# Altium PCB M-Test-Board.PcbDoc (part 1 of 2)
Units mm, origin at the board's own origin, x right, y up, seen from the top; angles counter-clockwise.
Board outline 140.08 x 105.54 mm, 2 copper layers (Top Layer, Bottom Layer); 209 components, 139 nets, 677 pads, 0 vias.
Unrouted connection lines stored in the file: 434.
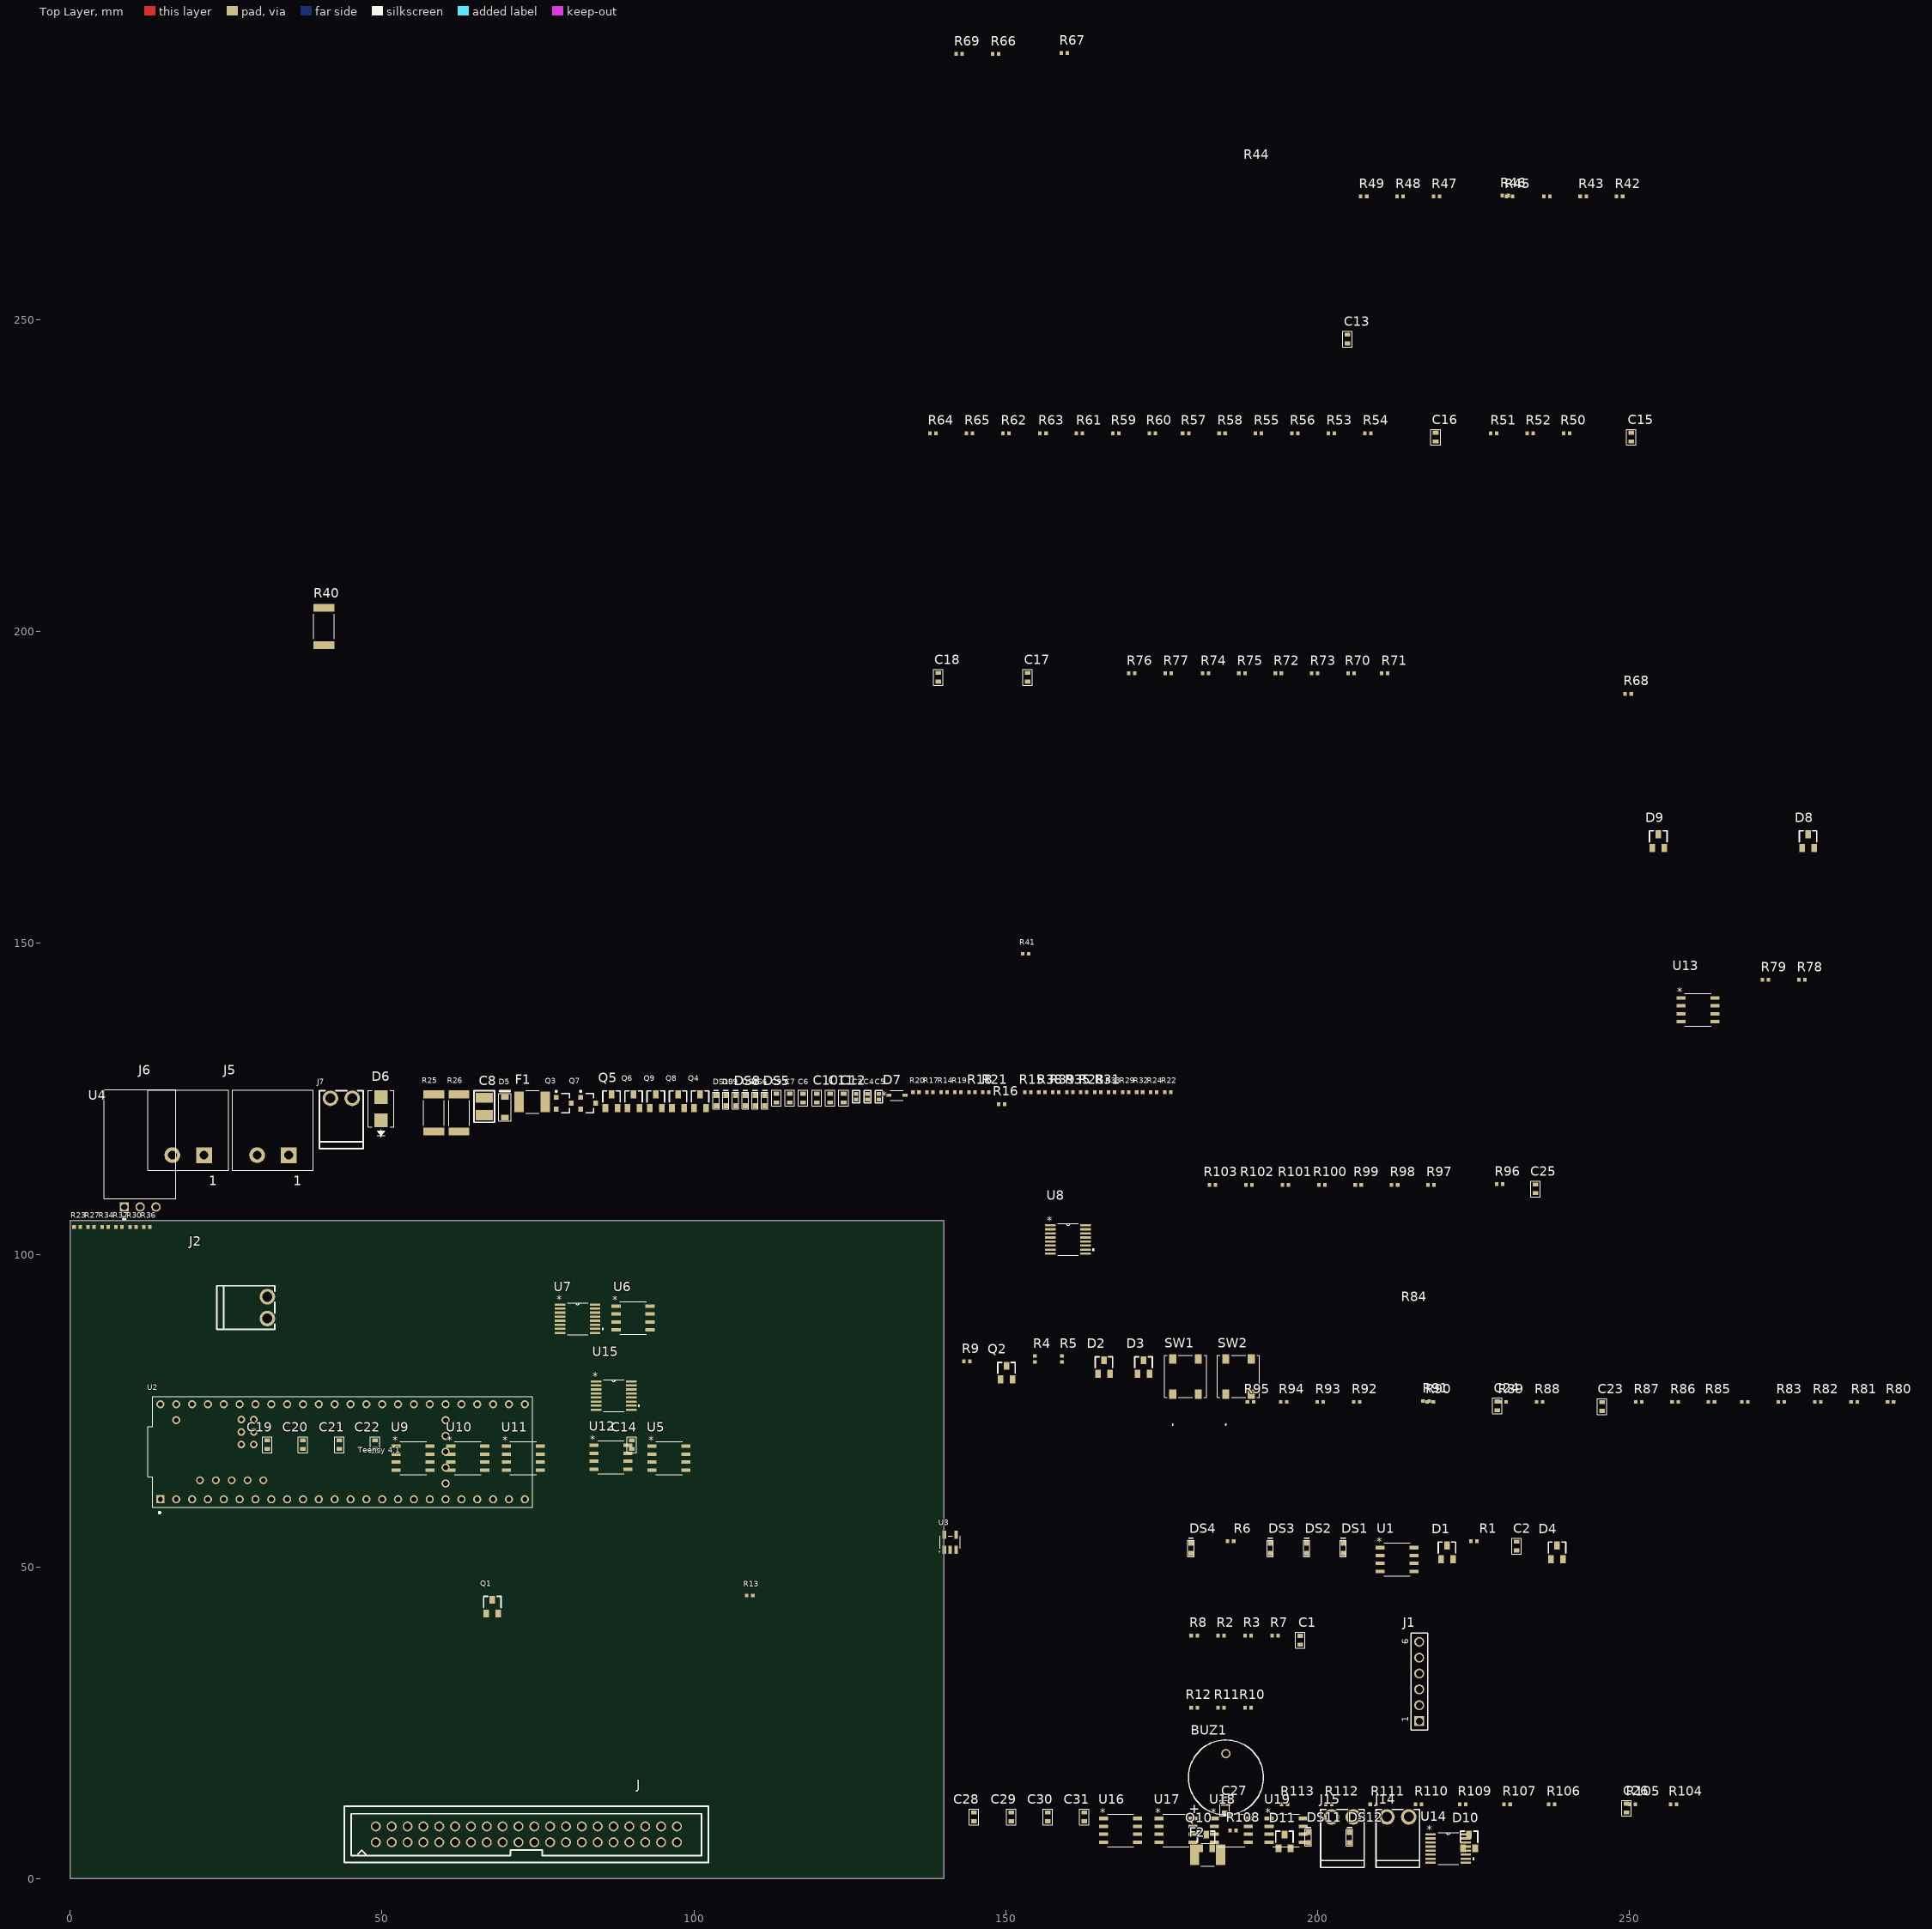
[diagram p0: Top Layer view]
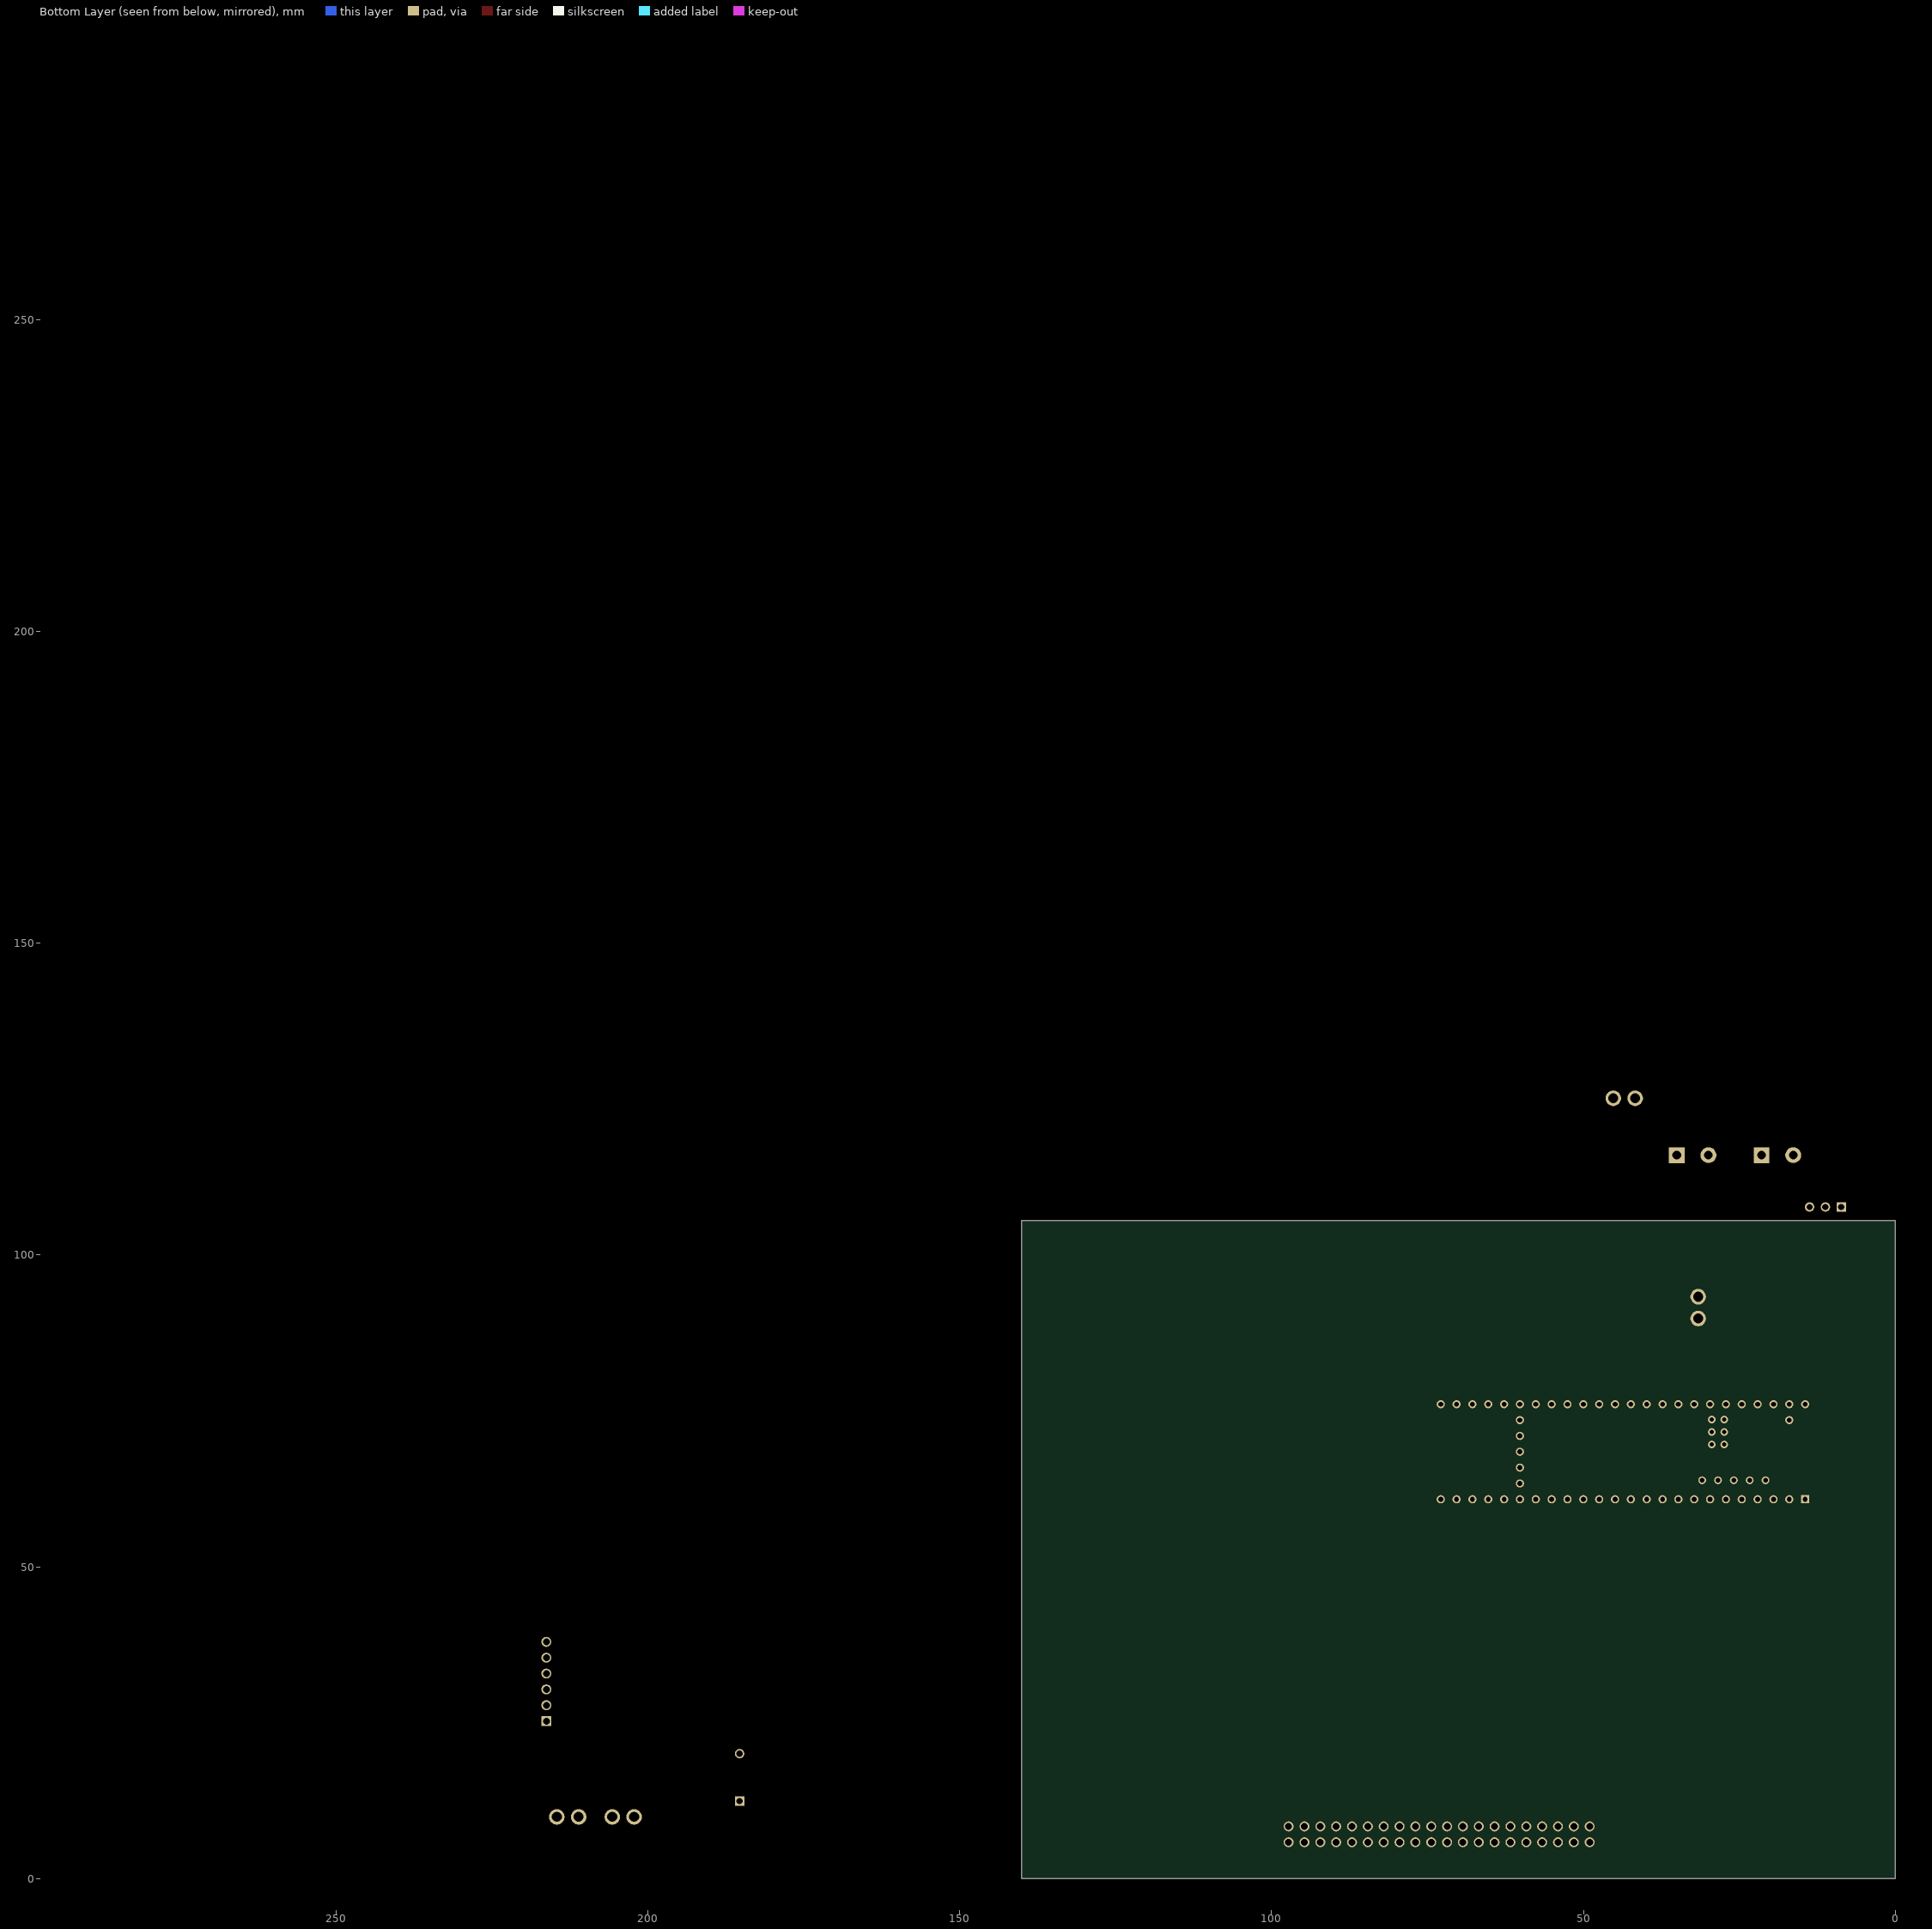
[diagram p1: Bottom Layer view, seen from below]

## Layer stack, top to bottom
Top Solder: solder mask 0.0102, Solder Resist, Dk 3.5
Top Layer: signal copper 0.0356
Dielectric 1: dielectric 0.32, FR-4, Dk 4.8
Bottom Layer: signal copper 0.0356
Bottom Solder: solder mask 0.0102, Solder Resist, Dk 3.5

## Board outline
0,0 140.081,0 140.081,105.537 0,105.537

## Design rules (kind name [scope] priority, off if disabled: settings)
Clearance [All] p1: gap=0.254 ignorepadtopadclearanceinfootprint=FALSE except(0: Arc-Hole Track-Hole SMDPad-Hole THPad-Hole Via-Hole Fill-Hole Poly-Hole Region-Hole Text-Hole)
PolygonConnect [All] p1: connectstyle=Relief reliefconductorwidth=0.254 reliefentries=4 polygonreliefangle="90 Angle" airgapwidth=0.254
RoomDefinition InputOutput [InComponentClass('InputOutput')] p1: confinementstyle=ConfineIn formatcopy=TRUE lockcomponents=FALSE outline 178.943,1.524 435.737,1.524 435.737,15.24 178.943,15.24
RoomDefinition Teensy [InComponentClass('Teensy')] p2: confinementstyle=ConfineIn formatcopy=TRUE lockcomponents=FALSE outline 178.943,24.257 194.818,24.257 194.818,30.734 178.943,30.734
RoomDefinition RibbonCable [InComponentClass('RibbonCable')] p3: confinementstyle=ConfineIn formatcopy=TRUE lockcomponents=FALSE outline 147.147,148.971 263.987,148.971 263.987,196.723 147.147,196.723
RoomDefinition Power [InComponentClass('Power')] p4: confinementstyle=ConfineIn formatcopy=TRUE lockcomponents=FALSE outline 0,0 139.7,0 139.7,105.029 0,105.029
RoutingVias [All] p1: holewidth=0.711 width=1.27 viastyle="Through Hole" minholewidth=0.711 minwidth=1.27 maxholewidth=0.711 maxwidth=1.27
SolderMaskExpansion [All] p1: expansion=0.102 istentingtop=FALSE
Width [All] p1: maxlimit=0.254 minlimit=0.254 preferedwidth=0.254
30 further rules are at their usual default settings.

## Classes and differential pairs
component class InputOutput: C24 C25 C26 C27 C28 C29 C30 C31 D10 D11 DS11 DS12 J10 J11 J12 J13 J14 J15 J16 Q10 R91 R96 R97 R100 R104 R106 R107 R112 R113 U13 U14 U15 U16 U17 U18 U19
component class RibbonCable: C13 C15 C16 C17 C18 C24 C25 C26 C27 D8 D9 R46 R67 R68 R91 R96 U4 U6 U7 U8 U12 U13 U14 U15
component class Power: C4 C6 C8 C9 C11 D5 D6 D7 DS5 DS6 DS7 DS8 DS9 DS10 F1 F2 J5 J7 Q3 Q4 Q5 Q6 Q7 Q8 Q9 R16 R21 R24 R27 R32 R33 R40 R67 U4
component class Teensy: BUZ1 C2 D4 D5 D6 DS1 DS2 DS3 DS4 J J1 J2 Q1 Q2 R2 R3 R6 R8 R10 R16 R21 SW1 SW2

## Components (designator, comment, footprint, x,y, rotation, side; value= is the part's Value field where it differs from the comment)
BUZ1 "CEM-1205-IC" BUZZ-MB5120C 185.293,12.446 r0 top
C1 "100nF" C0603 197.231,38.227 r0 top
C2 "4.7uF" C0603 231.902,53.34 r0 top
C3 "1uF" C0402 126.004,125.374 r90 top
C4 "1uF" C0402 127.833,125.374 r90 top
C5 "1uF" C0402 129.662,125.374 r90 top
C6 "4.7uF" C0603 117.533,125.158 r0 top
C7 "100nF" C0603 115.374,125.158 r0 top
C8 "47uF" C1210 66.398,123.825 r0 top
C9 "100nF" C0603 113.215,125.158 r0 top
C10 "100nF" C0603 119.692,125.158 r0 top
C11 "4.7uF" C0603 121.851,125.158 r0 top
C12 "100nF" C0603 124.01,125.158 r0 top
C13 "100nF" C0603 204.805,246.888 r0 top
C14 "100nF" C0603 90.043,69.596 r0 top
C15 "4.7uF" C0603 250.294,231.14 r0 top
C16 "100nF" C0603 218.925,231.14 r0 top
C17 "4.7uF" C0603 153.52,192.659 r0 top
C18 "100nF" C0603 139.169,192.659 r0 top
C19 "100nF" C0603 31.623,69.596 r0 top
C20 "100nF" C0603 37.338,69.596 r0 top
C21 "100nF" C0603 43.18,69.596 r0 top
C22 "100nF" C0603 48.895,69.596 r0 top
C23 "100nF" C0603 245.618,75.692 r0 top
C24 "4.7uF" C0603 228.808,75.819 r0 top
C25 "100nF" C0603 234.904,110.617 r0 top
C26 "4.7uF" C0603 249.509,11.303 r0 top
C27 "100nF" C0603 185.12,11.303 r0 top
C28 "100nF" C0603 144.907,9.906 r0 top
C29 "100nF" C0603 150.876,9.906 r0 top
C30 "100nF" C0603 156.718,9.906 r0 top
C31 "100nF" C0603 162.56,9.906 r0 top
D1 "BAT54S" sot23-3 220.726,52.324 r0 top
D2 "BAT54S" sot23-3 165.735,82.042 r0 top
D3 "BAT54S" sot23-3 172.085,82.042 r0 top
D4 "BAT54S" sot23-3 238.379,52.324 r0 top
D5 "B5819WS-TP" MCC-SOD123_V 69.709,123.701 r90 top
D6 "B240Q-13-F" DIODE_DO214AA 49.847,123.444 r90 top
D7 "3.9V" SOD-323_1P8X1P35_ONS 132.532,125.616 r0 top
D8 "BAT54S" sot23-3 278.615,166.37 r0 top
D9 "BAT54S" sot23-3 254.612,166.37 r0 top
D10 "BAT54S" sot23-3 224.282,5.969 r0 top
D11 "BAT54S" sot23-3 194.691,5.969 r0 top
DS1 "LTST-C193KFKT-5A" LED-ORANGE_0603 204.089,52.959 r90 top
DS2 "LTST-C193KSKT-5A" LED-YELLOW_0603 198.247,52.959 r90 top
DS3 "LTST-C193TGKT-5A" LED-GREEN_0603 192.405,52.959 r90 top
DS4 "LTST-C193KRKT-5A" LED-RED_0603 179.705,52.959 r90 top
DS5 "LTST-C193TGKT-5A" LED-GREEN_0603 111.365,124.767 r90 top
DS6 "LTST-C193KSKT-5A" LED-YELLOW_0603 109.807,124.767 r90 top
DS7 "LTST-C193KFKT-5A" LED-ORANGE_0603 108.249,124.767 r90 top
DS8 "LTST-C193KFKT-5A" LED-ORANGE_0603 106.691,124.767 r90 top
DS9 "LTST-C193TGKT-5A" LED-GREEN_0603 105.133,124.767 r90 top
DS10 "LTST-C193KRKT-5A" LED-RED_0603 103.575,124.767 r90 top
DS11 "LTST-C193KFKT-5A" LED-ORANGE_0603 198.501,6.604 r90 top
DS12 "LTST-C193TGKT-5A" LED-GREEN_0603 205.105,6.604 r90 top
F1 "MF-MSMF050-2" FUSE_F050-2 74.087,124.587 r0 top
F2 "MF-MSMF050-2" FUSE_F050-2 182.372,3.81 r0 top
J "61204021621" IDC-TH_Z-231011040106 73.152,7.112 r0 top
J1 "" 61300611121 216.281,31.623 r90 top
J2 "EBSA-02-A" CONN-TH_2P-P3.50_JL15EDGRC-35002G01 31.623,91.567 r270 top
J5 "Green 5.08mm" Conn_5433668 35.059,116.014 r0 top
J6 "Gray 5.08mm" Conn_5442002 21.47,116.014 r0 top
J7 "EBSA-02-A" CONN-TH_2P-P3.50_JL15EDGRC-35002G01 43.484,125.14 r0 top
J14 "EBSA-02-A" CONN-TH_2P-P3.50_JL15EDGRC-35002G01 212.852,9.906 r0 top
J15 "EBSA-02-A" CONN-TH_2P-P3.50_JL15EDGRC-35002G01 203.962,9.906 r0 top
Q1 "MMBT3904" SOT23-3 67.691,43.626 r0 top
Q2 "MMBT3904" SOT23-3 150.114,81.153 r0 top
Q3 "AO3401A" AO-SOT-23-3L_V 79.141,124.342 r0 top
Q4 "MMBT3904" SOT23-3 101.01,124.663 r0 top
Q5 "MMBT3906" sot23-3 86.786,124.663 r0 top
Q6 "MMBT3904" SOT23-3 90.342,124.663 r0 top
Q7 "AO3401A" AO-SOT-23-3L_V 83.052,124.342 r0 top
Q8 "MMBT3904" SOT23-3 97.454,124.663 r0 top
Q9 "MMBT3904" SOT23-3 93.898,124.663 r0 top
Q10 "MMBT3904" sot23-3 182.118,5.969 r0 top
R1 "5.1K 1%" R0402 225.044,54.102 r0 top
R2 "330R 1%" R0402 184.531,38.989 r0 top
R3 "330R 1%" R0402 188.849,38.989 r0 top
R4 "1K 1%" R0402 154.686,83.312 r90 top
R5 "1K 1%" R0402 159.004,83.312 r90 top
R6 "120R" R0402 186.055,54.102 r0 top
R7 "10K 1%" R0402 193.167,38.989 r0 top
R8 "100K 1%" R0402 180.213,38.989 r0 top
R9 "1K 1%" r0402 143.764,82.931 r0 top
R10 "330R 1%" R0402 188.849,27.432 r0 top
R11 "330R 1%" R0402 184.531,27.432 r0 top
R12 "330R 1%" R0402 180.213,27.432 r0 top
R13 "330R 1%" R0402 108.966,45.404 r0 top
R14 "330R 1%" R0402 140.091,126.09 r0 top
R15 "10K 1%" R0402 153.538,126.09 r0 top
R16 "10K 1%" R0402 149.352,124.206 r0 top
R17 "5.1K 1%" R0402 137.85,126.09 r0 top
R18 "10K 1%" R0402 144.573,126.09 r0 top
R19 "10K 1%" R0402 142.332,126.09 r0 top
R20 "100K 1%" R0402 135.609,126.09 r0 top
R21 "2.8K 1%" R0402 146.815,126.09 r0 top
R22 "10K 1%" R0402 175.95,126.09 r0 top
R23 "10K 1%" R0402 1.121,104.499 r0 top
R24 "100K 1%" R0402 173.709,126.09 r0 top
R25 "220R 5%" RESC6331X75N 58.319,122.785 r90 top
R26 "220R 5%" RESC6331X75N 62.35,122.785 r90 top
R27 "10K 1%" R0402 3.362,104.499 r0 top
R28 "10K 1%" R0402 162.503,126.09 r0 top
R29 "5.1K 1%" R0402 169.227,126.09 r0 top
R30 "10K 1%" R0402 10.085,104.499 r0 top
R31 "10K 1%" R0402 164.744,126.09 r0 top
R32 "100K 1%" R0402 171.468,126.09 r0 top
R33 "100K 1%" R0402 166.985,126.09 r0 top
R34 "2.8K 1%" R0402 5.603,104.499 r0 top
R35 "2.8K 1%" R0402 160.262,126.09 r0 top
R36 "10K 1%" R0402 12.327,104.499 r0 top
R37 "100K 1%" R0402 7.844,104.499 r0 top
R38 "680R 1%" R0402 155.779,126.09 r0 top
R39 "330R 1%" R0402 158.021,126.09 r0 top
R40 "220R 5%" RESC6331X75N 40.699,200.787 r90 top
R41 "5.1K 1%" R0402 153.202,148.315 r0 top
R42 "51K 1%" R0402 248.412,269.748 r0 top
R43 "51K 1%" R0402 242.57,269.748 r0 top
R44 "51K 1%" R0402 236.728,269.748 r0 top
R45 "2.8K 1%" R0402 230.759,269.748 r0 top
R46 "8.2K 1%" R0402 230.078,269.875 r0 top
R47 "8.2K 1%" R0402 219.075,269.748 r0 top
R48 "8.2K 1%" R0402 213.233,269.748 r0 top
R49 "2.8K 1%" R0402 207.391,269.748 r0 top
R50 "10K 1%" R0402 239.926,231.775 r0 top
R51 "10K 1%" R0402 228.242,231.775 r0 top
R52 "10K 1%" R0402 234.084,231.775 r0 top
R53 "10K 1%" R0402 202.207,231.775 r0 top
R54 "10K 1%" R0402 208.049,231.775 r0 top
R55 "10K 1%" R0402 190.523,231.775 r0 top
R56 "10K 1%" R0402 196.365,231.775 r0 top
R57 "10K 1%" R0402 178.839,231.775 r0 top
R58 "10K 1%" R0402 184.681,231.775 r0 top
R59 "10K 1%" R0402 167.663,231.775 r0 top
R60 "10K 1%" R0402 173.505,231.775 r0 top
R61 "10K 1%" R0402 161.821,231.775 r0 top
R62 "10K 1%" R0402 150.01,231.775 r0 top
R63 "10K 1%" R0402 155.979,231.775 r0 top
R64 "10K 1%" R0402 138.326,231.775 r0 top
R65 "10K 1%" R0402 144.168,231.775 r0 top
R66 "10K 1%" R0402 148.359,292.608 r0 top
R67 "10K 1%" R0402 159.362,292.735 r0 top
R68 "10K 1%" R0402 249.786,189.992 r0 top
R69 "10K 1%" R0402 142.517,292.608 r0 top
R70 "10K 1%" R0402 205.382,193.294 r0 top
R71 "10K 1%" R0402 210.716,193.294 r0 top
R72 "10K 1%" R0402 193.698,193.294 r0 top
R73 "10K 1%" R0402 199.54,193.294 r0 top
R74 "10K 1%" R0402 182.014,193.294 r0 top
R75 "10K 1%" R0402 187.856,193.294 r0 top
R76 "10K 1%" R0402 170.203,193.294 r0 top
R77 "10K 1%" R0402 176.045,193.294 r0 top
R78 "51K 1%" R0402 277.645,144.145 r0 top
R79 "51K 1%" R0402 271.803,144.145 r0 top
R80 "51K 1%" R0402 291.846,76.454 r0 top
R81 "51K 1%" R0402 286.004,76.454 r0 top
R82 "51K 1%" R0402 280.162,76.454 r0 top
R83 "51K 1%" R0402 274.32,76.454 r0 top
R84 "51K 1%" R0402 268.478,76.454 r0 top
R85 "51K 1%" R0402 263.144,76.454 r0 top
R86 "2.8K 1%" R0402 257.302,76.454 r0 top
R87 "2.8K 1%" R0402 251.46,76.454 r0 top
R88 "10K 1%" R0402 235.585,76.454 r0 top
R89 "10K 1%" R0402 229.743,76.454 r0 top
R90 "10K 1%" R0402 218.059,76.454 r0 top
R91 "10K 1%" R0402 217.378,76.581 r0 top
R92 "10K 1%" R0402 206.248,76.454 r0 top
R93 "10K 1%" R0402 200.406,76.454 r0 top
R94 "10K 1%" R0402 194.564,76.454 r0 top
R95 "10K 1%" R0402 189.23,76.454 r0 top
R96 "51K 1%" R0402 229.189,111.379 r0 top
R97 "51K 1%" R0402 218.186,111.252 r0 top
R98 "51K 1%" R0402 212.344,111.252 r0 top
R99 "51K 1%" R0402 206.502,111.252 r0 top
R100 "10K 1%" R0402 200.66,111.252 r0 top
R101 "10K 1%" R0402 194.818,111.252 r0 top
R102 "10K 1%" R0402 188.976,111.252 r0 top
R103 "2.8K 1%" R0402 183.134,111.252 r0 top
R104 "10K 1%" R0402 257.048,11.938 r0 top
R105 "10K 1%" R0402 250.444,11.938 r0 top
R106 "10K 1%" R0402 237.49,11.938 r0 top
R107 "10K 1%" R0402 230.378,11.938 r0 top
R108 "330R 1%" R0402 186.436,7.747 r0 top
R109 "10K 1%" R0402 223.266,11.938 r0 top
R110 "10K 1%" R0402 216.154,11.938 r0 top
R111 "10K 1%" R0402 208.915,11.938 r0 top
R112 "10K 1%" R0402 201.803,11.938 r0 top
R113 "10K 1%" R0402 194.691,11.938 r0 top
SW1 "KSC741J LFS-Blue" SON4_KSC741JLFS_CNK 178.816,80.518 r90 top
SW2 "KSC441J70SHLFS-Yellow" SON4_KSC741JLFS_CNK 187.325,80.518 r90 top
U1 "SP485EEN-L/TR-ND" NSOIC-8 212.725,51.181 r0 top
U2 "Teensy 4.1" MODULE_DEV-16771 43.688,68.453 r0 top
U3 "LK112M33TR" SOT23-5L_STM 141.097,53.956 r90 top
U4 "V7805-2000R" CONV_V7805-2000R 11.229,117.805 r90 top
U5 "TPD4E001DRLR" NSOIC-8 96.012,67.437 r0 top
U6 "LPV358M/NOPB" M08A_TEX 90.251,89.916 r0 top
U7 "CD74HC4051PWR" 16-TSSOP-4.4mm 81.361,89.789 r0 top
U8 "CD74HC4051PWR" 16-TSSOP-4.4mm 159.974,102.489 r0 top
U9 "TPD4E001DRLR" NSOIC-8 54.991,67.437 r0 top
U10 "TPD4E001DRLR" NSOIC-8 63.754,67.437 r0 top
U11 "TPD4E001DRLR" NSOIC-8 72.644,67.437 r0 top
U12 "TPD4E001DRLR" NSOIC-8 86.695,67.564 r0 top
U13 "LPV358M/NOPB" M08A_TEX 260.962,139.319 r0 top
U14 "CD74HC4051PWR" 16-TSSOP-4.4mm 220.934,4.826 r0 top
U15 "CD74HC4051PWR" 16-TSSOP-4.4mm 87.145,77.47 r0 top
U16 "TPD4E001DRLR" NSOIC-8 168.402,7.747 r0 top
U17 "TPD4E001DRLR" NSOIC-8 177.292,7.747 r0 top
U18 "TPD4E001DRLR" NSOIC-8 186.182,7.747 r0 top
U19 "TPD4E001DRLR" NSOIC-8 194.945,7.747 r0 top

## Footprints (in the part's own frame and the unit in brackets; to place one, negate y for a bottom-side part, rotate by r counter-clockwise, add the part's x,y. Pads: shape width x height; smd on the part's side, far side on the other; paste and mask are expansions set on the pad)
16-TSSOP-4.4mm [mil]
  rect 66x14 smd: 1(-111,89.57) 2(-111,63.98) 3(-111,38.39) 4(-111,12.8) 5(-111,-12.8) 6(-111,-38.39) 7(-111,-63.98) 8(-111,-89.57) 9(111,-89.57) 10(111,-63.98) 11(111,-38.39) 12(111,-12.8) 13(111,12.8) 14(111,38.39) 15(111,63.98) 16(111,89.57)
  silkscreen extent -66,-100 164,100, body extent -130,-101 130,101, height 47
61300611121 [mm] "Pin Header, pitch 2.54 mm, THT, Vertical, single row, 6p"
  rect 1.6x1.6 hole 1.1: 1(-6.35,0)
  round 1.6 hole 1.1: 2(-3.81,0) 3(-1.27,0) 4(1.27,0) 5(3.81,0) 6(6.35,0)
  silkscreen extent -7.77,-1.35 7.77,1.35, body extent -7.62,-1.27 7.62,1.27, height 8.57
AO-SOT-23-3L_V [mm] "SOT23, 3-Leads, Body 3.1x1.8mm, Pitch 0.95mm"
  rect 0.8x0.8 smd: 1(-1.2,0.95) 2(-1.2,-0.95) 3(1.2,0)
  silkscreen extent -1.32,-1.55 0.9,2.02, body extent -1.5,-1.58 1.5,1.52, height 1.25
BUZZ-MB5120C [mil]
  rect 60x60 / inner round 60 / far side rect 60x60 hole 40: 1(0,0)
  round 60 hole 40: 2(0,299.21)
  silkscreen extent -236,-87 236,385, body extent -234,-86 238,386, height 355
C0402 [mil]
  rect 24x28 smd: 1(-17.7,0) 2(17.7,0)
  silkscreen extent -40,-22 40,22, body extent -21,-11 21,11, height 22
C0603 [mm]
  rect 0.9x0.65 smd: 1(0,0.71) 2(0,-0.7)
  silkscreen extent -0.76,-1.27 0.76,1.27, body extent -0.48,-0.87 0.48,0.87, height 0.87
C1210 [mm]
  rect 2.7x1.6 smd: 1(0,1.397) 2(0,-1.397)
  silkscreen extent -1.65,-2.54 1.65,2.54, body extent -0.9,-1.7 0.9,1.7, height 0.94
CONN-TH_2P-P3.50_JL15EDGRC-35002G01 [mm]
  round 2.5 hole 1.6: 1(-1.75,0) 2(1.75,0)
  silkscreen extent -3.5,-8.1 3.5,1.2, body extent -3.92,-8.03 3.68,1.17, height 6.91
Conn_5433668 [mil]
  rect 100x100 hole 55 mask+3: 1(0,0)
  round 100 hole 55 mask+3: 2(-200,0)
  silkscreen extent -355,-95 155,410, body extent -339,-79 139,394, height 339
Conn_5442002 [mil]
  rect 100x100 hole 55 mask+3: 1(0,0)
  round 100 hole 55 mask+3: 2(-200,0)
  silkscreen extent -355,-95 155,410, body extent -339,-79 139,394, height 339
CONV_V7805-2000R [mm]
  rect 1.508x1.508 hole 1: 1(-10.1,2.54)
  round 1.508 hole 1: 2(-10.1,0) 3(-10.1,-2.54)
  silkscreen extent -12.07,-5.75 8.75,5.75, body extent -10.26,-5.78 8.74,5.72, height 9.01
DIODE_DO214AA [mil]
  rect 86x86 smd: 1(-73,0) 2(73,0)
  silkscreen extent -180,-82 115,82, body extent -110,-77 110,77, height 98
FUSE_F050-2 [mil]
  rect 59x130 smd paste+0 mask+0: 1(-82.5,0) 2(82.5,0)
  silkscreen extent -42,-72 42,72, body extent -93,-67 93,67, height 33
IDC-TH_Z-231011040106 [mm]
  round 1.6 hole 1.1: 1(-24.13,-1.27) 2(-24.13,1.27) 3(-21.59,-1.27) 4(-21.59,1.27) 5(-19.05,-1.27) 6(-19.05,1.27) 7(-16.51,-1.27) 8(-16.51,1.27) 9(-13.97,-1.27) 10(-13.97,1.27) 11(-11.43,-1.27) 12(-11.43,1.27) 13(-8.89,-1.27) 14(-8.89,1.27) 15(-6.35,-1.27) 16(-6.35,1.27) 17(-3.81,-1.27) 18(-3.81,1.27) 19(-1.27,-1.27) 20(-1.27,1.27) 21(1.27,-1.27) 22(1.27,1.27) 23(3.81,-1.27) 24(3.81,1.27) 25(6.35,-1.27) 26(6.35,1.27) 27(8.89,-1.27) 28(8.89,1.27) 29(11.43,-1.27) 30(11.43,1.27) 31(13.97,-1.27) 32(13.97,1.27) 33(16.51,-1.27) 34(16.51,1.27) 35(19.05,-1.27) 36(19.05,1.27) 37(21.59,-1.27) 38(21.59,1.27) 39(24.13,-1.27) 40(24.13,1.27)
  silkscreen extent -29.2,-4.5 29.2,4.52, body extent -29.26,-4.35 29.2,4.83, height 4.43
LED-GREEN_0603 [mm] "SMD, 2-Leads, Body 1.6x0.8mm"
  rect 0.8x0.8 smd: 1(-0.825,0) 2(0.825,0)
  silkscreen extent -1.33,-0.49 1.62,0.51, body extent -0.8,-0.4 0.8,0.4, height 0.4
LED-ORANGE_0603 [mm] "SMD, 2-Leads, Body 1.6x0.8mm"
  rect 0.8x0.8 smd: 1(-0.825,0) 2(0.825,0)
  silkscreen extent -1.33,-0.49 1.62,0.51, body extent -0.8,-0.4 0.8,0.4, height 0.4
LED-RED_0603 [mm] "SMD, 2-Leads, Body 1.6x0.8mm"
  rect 0.8x0.8 smd: 1(-0.825,0) 2(0.825,0)
  silkscreen extent -1.33,-0.49 1.62,0.51, body extent -0.8,-0.4 0.8,0.4, height 0.4
LED-YELLOW_0603 [mm] "SMD, 2-Leads, Body 1.6x0.8mm"
  rect 0.8x0.8 smd: 1(-0.825,0) 2(0.825,0)
  silkscreen extent -1.33,-0.49 1.62,0.51, body extent -0.8,-0.4 0.8,0.4, height 0.4
M08A_TEX [mil]
  rect 57.5x22 smd paste+0 mask+0: 1(-107.25,75) 2(-107.25,25) 3(-107.25,-25) 4(-107.25,-75) 5(107.25,-75) 6(107.25,-25) 7(107.25,25) 8(107.25,75)
  silkscreen extent -84,-104 84,104, body extent -122,-99 122,99, height 69
MCC-SOD123_V [mil] "SOD123, 2-Leads, Body 2.7x1.6mm, Height 1.35mm"
  rect 35.98x47.99 smd: 1(-64.5,0) 2(64.5,0)
  silkscreen extent -86,-39 102,39, body extent -53,-30 53,32, height 53
MODULE_DEV-16771 [mm]
  round 1.308 hole 0.8: 0(-26.67,-7.62) 1(-24.13,-7.62) 2(-21.59,-7.62) 3(-19.05,-7.62) 3.3V_1(6.35,-7.62) 3.3V_2(-24.13,7.62) 3.3V_3(16.51,-2.54) 4(-16.51,-7.62) 5(-13.97,-7.62) 6(-11.43,-7.62) 7(-8.89,-7.62) 8(-6.35,-7.62) 9(-3.81,-7.62) 10(-1.27,-7.62) 11(1.27,-7.62) 12(3.81,-7.62) 13(3.81,7.62) 14(1.27,7.62) 15(-1.27,7.62) 16(-3.81,7.62) 17(-6.35,7.62) 18(-8.89,7.62) 19(-11.43,7.62) 20(-13.97,7.62) 21(-16.51,7.62) 22(-19.05,7.62) 23(-21.59,7.62) 24(8.89,-7.62) 25(11.43,-7.62) 26(13.97,-7.62) 27(16.51,-7.62) 28(19.05,-7.62) 29(21.59,-7.62) 30(24.13,-7.62) 31(26.67,-7.62) 32(29.21,-7.62) 33(29.21,7.62) 34(26.67,7.62) 35(24.13,7.62) 36(21.59,7.62) 37(19.05,7.62) 38(16.51,7.62) 39(13.97,7.62) 40(11.43,7.62) 41(8.89,7.62) GND2(6.35,7.62) GND3(-26.67,7.62) GND4(16.51,0) ON/OFF(16.51,5.08) PROGRAM(16.51,2.54) VBAT(16.51,-5.08) VIN(-29.21,7.62) VUSB(-26.67,5.08)
  round 1.258 hole 0.75: 5V(-22.86,-4.57) D+(-17.78,-4.57) D-(-20.32,-4.57) USB_GND1(-15.24,-4.57) USB_GND2(-12.7,-4.57)
  rect 1.308x1.308 hole 0.8: GND1(-29.21,-7.62)
  round 1.208 hole 0.7: GND5(-14.24,3.17) LED(-16.24,3.17) R+(-16.24,5.17) R-(-14.24,5.17) T+(-14.24,1.17) T-(-16.24,1.17)
  silkscreen extent -31.18,-9.91 30.48,8.89, body extent -30.8,-9.02 30.86,8.76, height 4.37
NSOIC-8 [mil]
  rect 57.5x22 smd paste+0 mask+0: 1(-107.25,75) 2(-107.25,25) 3(-107.25,-25) 4(-107.25,-75) 5(107.25,-75) 6(107.25,-25) 7(107.25,25) 8(107.25,75)
  silkscreen extent -84,-104 84,104, body extent -122,-99 122,99, height 69
R0402 [mm] "Generic R0402 Resistor"
  rect 0.56x0.6 smd: 1(-0.485,0) 2(0.485,0)
  body extent -0.52,-0.28 0.52,0.28, height 0.41
r0402 [mm] "Generic R0402 Resistor"
  rect 0.56x0.6 smd: 1(-0.485,0) 2(0.485,0)
  body extent -0.52,-0.28 0.52,0.28, height 0.41
RESC6331X75N [mm]
  rect 1.26x3.32 smd: 1(-2.975,0) 2(2.975,0)
  silkscreen extent -2.02,-1.65 2.02,1.65, body extent -3.25,-1.73 3.25,1.73, height 0.71
SOD-323_1P8X1P35_ONS [mil]
  rect 31x18 smd paste+0 mask+0: 1(-51.5,0) 2(51.5,0)
  silkscreen extent -40,-32 40,32, body extent -53,-26 53,26, height 39
SON4_KSC741JLFS_CNK [mil]
  rect 59x45 smd paste+0 mask+0: 1(-110.5,80.71) 2(-110.5,-80.71) 3(110.5,-80.71) 4(110.5,80.71)
  silkscreen extent -307,-133 133,133, body extent -128,-128 128,128, height 185
sot23-3 [mil]
  rect 36x50 smd: 1(-38,-43) 2(38,-43) 3(0,43)
  silkscreen extent -55,-5 55,65, body extent -60,-52 60,52, height 44
SOT23-3 [mil]
  rect 36x50 smd: 1(-38,-43) 2(38,-43) 3(0,43)
  silkscreen extent -55,-5 55,65, body extent -60,-52 60,52, height 44
SOT23-5L_STM [mil]
  rect 52x22 smd paste+0 mask+0: 1(-47,37.4) 2(-47,0) 3(-47,-37.4) 4(47,-37.4) 5(47,37.4)
  silkscreen extent -40,-64 40,64, body extent -59,-59 59,59, height 57

## Part data
BUZ1: library part Mod-0003, "12 mm, 5 Vdc, 92 dB, Through Hole, Driving Circuit, Magnetic Audio Indicator Buzzer", ADI Part Number=3716-0001, Current=35mA, JLCPCB_PART=NA, LCSC Part Number=N/A, Manufacturer="CUI Devices", Supplier Part Number 1=490-CEM1205IC, Voltage=5V, Category=Buzzers, CLASS=DISCRETE, COMPFIXED=NO, COMPGROUP=0, COMPHEIGHT=0.000, COMPKEY=NO, COMPLOC=[1301.000,1659.000], COMPLOCKED=NO, COMPROT=180, COMPSIDE=TOP, DECOUPLER=NO, Manufacturer Part Number=CEM-1205-IC, Mount="Through Hole", Part Name=Mod-0003, PCB Footprint=BUZZ-MB5120C, Pricing 1="1=1.87000, 10=1.55000, 50=1.35000, 100=1.2700", RoHS=Yes, S2 PN=S2-BZ-0001, S2PN=S2-BZ-0001, Stock 1=774, Supplier 1=Mouser
C1 C7 C9 C10 C12 C13 C14 C16 C18 C19 C20 C21 C22 C23 C25 C27 C28 C29 C30 C31: library part Cap-00002, "MLC Capacitor, CC Series, 0.1 uF, - 10%, X7R, 50 V, 0603 [1608 Metric]", Case Code (Imperial)=0603, Case Code (Metric)=1608, Color=Blue, Dielectric=X7R, Dielectric Material=Ceramic, Forward Current=25mA, Forward Voltage=3V, LCSC Part Number=C14663, Manufacturer=Yageo, Manufacturer Part Number=CC0603KRX7R9BB104, Max Operating Temperature=125°C, Min Operating Temperature=-55°C, Package Quantity=1, Power Dissipation=110W, Reverse Voltage=5V, Supplier Part Number 1=65R8251, Test Current=20mA, Tolerance=10%, Voltage=50V, Capacitance=100nF, Case/Package=0603, Category="Ceramic Capacitors", ComponentLink1Description=https://datasheet.ciiva.com/11786/0900766b80d, ComponentLink1URL=https://datasheet.ciiva.com/11786/0900766b80d, ComponentLink2Description=https://datasheet.ciiva.com/8033/70765-803381, ComponentLink2URL=https://datasheet.ciiva.com/8033/70765-803381, ComponentLink3Description=https://datasheet.ciiva.com/8033/70765-803382, ComponentLink3URL=https://datasheet.ciiva.com/8033/70765-803382, ComponentLink4Description=https://datasheet.ciiva.com/7978/1489800-7978, ComponentLink4URL=https://datasheet.ciiva.com/7978/1489800-7978, ComponentLink5Description=https://datasheet.ciiva.com/31394/1489800-313, ComponentLink5URL=https://datasheet.ciiva.com/31394/1489800-313, ComponentLink6Description=https://datasheet.ciiva.com/22749/1489800-227, ComponentLink6URL=https://datasheet.ciiva.com/22749/1489800-227, ComponentLink7Description=https://datasheet.ciiva.com/144/mlccorderingc, ComponentLink7URL=https://datasheet.ciiva.com/144/mlccorderingc, ComponentLink8Description=https://datasheet.ciiva.com/144/mlccorderingc, ComponentLink8URL=https://datasheet.ciiva.com/144/mlccorderingc, ComponentLink9Description=https://datasheet.ciiva.com/144/mlccorderingc, ComponentLink9URL=https://datasheet.ciiva.com/144/mlccorderingc, ComponentLink10Description=https://datasheet.ciiva.com/16302/19-217-bhc-, ComponentLink10URL=https://datasheet.ciiva.com/16302/19-217-bhc-, ComponentLink11Description=https://datasheet.ciiva.com/26901/getdatashee, ComponentLink11URL=https://datasheet.ciiva.com/26901/getdatashee, Depth=0.8mm, Dominant Wavelength=470nm, Halogen Free="Halogen Free", Height=0.8mm, Lead Free="Lead Free", Length=1.6mm, Lens Style=Diffused,Colorless,Rectangular,Clear, Luminous Intensity=28.5mcd, Mount="Surface Mount", Number of Elements=1, Number of LEDs=1, Number of Pins=2, Packaging="Tape and Reel", Part Name=Cap-00002, Pricing 1="1=0.01200, 4000=0.01100, 8000=0.01100, 16000=", Radiation Hardening=No, REACH SVHC="No SVHC", RoHS=Yes, RoHS Compliant=Yes, Series=CC, Stock 1=72000, Supplier 1=Newark, Termination=SMD/SMT, Thickness=0.035inch, Viewing Angle=120°, Voltage Rating=50V, Width=0.031inch
C2 C6 C11 C15 C17 C24 C26: library part Cap-00001, "CAP CER 4.7UF 16V X5R 0603", Case Code (Imperial)=0603, Case Code (Metric)=1608, Dielectric=X5R, Dielectric Material=Ceramic, LCSC Part Number=C19666, Manufacturer=Samsung, Manufacturer Part Number=CL10A475KO8NNNC, Max Operating Temperature=85°C, Min Operating Temperature=-55°C, Package Quantity=1, Supplier Part Number 1=1276-1784-1-ND, Tolerance=10%, Voltage=16V, Capacitance=4.7uF, Case/Package=0603, Category="Ceramic Capacitors", ComponentLink1Description=https://datasheet.ciiva.com/25795/cl10a475ko8, ComponentLink1URL=https://datasheet.ciiva.com/25795/cl10a475ko8, ComponentLink2Description=https://datasheet.ciiva.com/26838/getdatashee, ComponentLink2URL=https://datasheet.ciiva.com/26838/getdatashee, ComponentLink3Description=https://datasheet.ciiva.com/29198/457663-da-0, ComponentLink3URL=https://datasheet.ciiva.com/29198/457663-da-0, Construction=Flat, Contact Plating=Tin, Depth=0.8mm, Height=0.8mm, Length=1.6mm, Material=Ceramic, Mount="Surface Mount", Number of Pins=2, Packaging="Tape and Reel", Part Name=Cap-00001, Pricing 1="1=0.13000, 10=0.09100, 50=0.05180, 100=0.0429", Radiation Hardening=No, RoHS=Yes, RoHS Compliant=Yes, Series=CL, Stock 1=1593998, Supplier 1=Digi-Key, Thickness=0.035inch, Voltage Rating=16V, Width=0.031inch
C3 C4 C5: library part Cap-00003, "CAP CER 1UF 10V Y5V 0402", Case Code (Imperial)=0402, Case Code (Metric)=1005, Dielectric Material=Ceramic, LCSC Part Number=C52923, Manufacturer=KEMET, Manufacturer Part Number=C0402C105Z8VAC7867, Max Operating Temperature=85°C, Min Operating Temperature=-30°C, Supplier Part Number 1=399-14873-1-ND, Tolerance=80%, Voltage Rating=10V, Capacitance=1uF, Case/Package=0402, Category="Ceramic Capacitors", ComponentLink1Description=https://api.kemet.com/component-edge/download, ComponentLink1URL=https://api.kemet.com/component-edge/download, Mount="Surface Mount", Number of Pins=2, Packaging="Cut Tape", Part Name=Cap-00003, Pricing 1="1=0.28000, 10=0.18900, 50=0.12580, 100=0.1070", RoHS=Yes, Stock 1=9702, Supplier 1=Digi-Key
C8: library part Cap-00004, "CAP CER 47UF 16V X5R 1210", Case Code (Imperial)=1210, Case Code (Metric)=3225, Dielectric=X5R, Dielectric Material=Ceramic, LCSC Part Number=C77101, Manufacturer=Murata, Manufacturer Part Number=GRM32ER61C476ME15L, Max Operating Temperature=85°C, Min Operating Temperature=-55°C, Package Quantity=1000, Supplier Part Number 1=490-3888-1-ND, Tolerance=20%, Voltage=16V, Capacitance=47uF, Case/Package=1210, Category="Ceramic Capacitors", ComponentLink1Description=https://datasheet.ciiva.com/141/product-14197, ComponentLink1URL=https://datasheet.ciiva.com/141/product-14197, ComponentLink2Description=https://datasheet.ciiva.com/14116/grm32er61c4, ComponentLink2URL=https://datasheet.ciiva.com/14116/grm32er61c4, ComponentLink3Description=https://datasheet.ciiva.com/7719/415303-77191, ComponentLink3URL=https://datasheet.ciiva.com/7719/415303-77191, ComponentLink4Description=https://datasheet.ciiva.com/141/partnumbering, ComponentLink4URL=https://datasheet.ciiva.com/141/partnumbering, ComponentLink5Description=https://datasheet.ciiva.com/141/partnumbering, ComponentLink5URL=https://datasheet.ciiva.com/141/partnumbering, ComponentLink6Description=https://datasheet.ciiva.com/16343/c02e-163436, ComponentLink6URL=https://datasheet.ciiva.com/16343/c02e-163436, Depth=2.5mm, Height=2.5mm, Lead Free="Lead Free", Length=3.2mm, Mount="Surface Mount", Number of Pins=2, Packaging="Tape and Reel", Part Name=Cap-00004, Pricing 1="1=0.73000, 10=0.53900, 50=0.43120, 100=0.3697", REACH SVHC="No SVHC", RoHS=Yes, RoHS Compliant=Yes, Series=GRM, Stock 1=238447, Supplier 1=Digi-Key, Termination=SMD/SMT, Thickness=0.106inch, Voltage Rating=16V, Voltage Rating (DC)=16V, Width=0.098inch
D1 D2 D3 D4 D8 D9 D10 D11: library part Diode-0009, "DIODE SCHOTTKY 30V 150MA SOT23-3", LCSC Part Number=C47546, Manufacturer="Sangdest Microelectronics", Package="SOT-23 Diodes Inc.", Supplier Part Number 1=1655-BAT54SCT-ND, Check_prices=https://www.snapeda.com/parts/BAT54S-7-F/Diodes%20Inc./view-part/45300/?ref=eda, Digi-Key_Part_Number=BAT54S-FDICT-ND, Lead Free="Lead Free", Manufacturer Part Number=BAT54S, MF="Diodes Inc.", Mount="Surface Mount", MP=BAT54S-7-F, Part Name=Diode-0009, Pricing 1="1=0.43000, 10=0.35100, 100=0.18620, 500=0.122", Purchase-URL=https://pricing.snapeda.com/search/part/BAT54S-7-F/?ref=eda, Radiation Hardening=No, RoHS=Yes, SnapEDA_Link=https://www.snapeda.com/parts/BAT54S-7-F/Diodes%20Inc./view-part/45300/?ref=snap, Stock 1=168252, Supplier 1=Digi-Key
D5: library part Diode-0002, "DIODE SCHOTTKY 40V 1A SOD323", Average Rectified Current=1A, Case Code (Imperial)=sod232, Color=Blue, Forward Current=25mA, Forward Voltage="600mV @ 1A", LCSC Part Number=C78734, Manufacturer=MCC, Max Operating Temperature=85°C, Max Reverse Voltage (DC)=40V, Min Operating Temperature=-40°C, Package Description="2-Pin Small Outline Diode, Body 2.7 x 1.6 mm, Height 1.35 mm", Package Reference=SOD123, Power Dissipation=110W, Reverse Voltage=5V, Supplier Part Number 1=B5819WS-TPMSCT-ND, Test Current=20mA, Case/Package=sod232, Category="Rectifier Diodes", Component Type=Diodes, ComponentLink1Description=https://datasheet.ciiva.com/16302/19-217-bhc-, ComponentLink1URL=https://datasheet.ciiva.com/16302/19-217-bhc-, ComponentLink2Description=https://datasheet.ciiva.com/26901/getdatashee, ComponentLink2URL=https://datasheet.ciiva.com/26901/getdatashee, Datasheet URL=http://www.mccsemi.com/up_pdf/B5817W-B5819W(SOD-123).pdf, Datasheet Version="Rev. B, 01/2013", Depth=0.8mm, Dominant Wavelength=470nm, Lead Free="Lead Free", Length=1.6mm, Lens Style=Diffused,Colorless,Rectangular,Clear, Luminous Intensity=28.5mcd, Manufacturer Part Number=B5819WS-TP, Manufacturer URL=http://www.mccsemi.com/, Mount="Surface Mount", Mounting Technology=SM, Number of Elements=1, Number of LEDs=1, Package URL=http://www.mccsemi.com/up_pdf/1N4448W(SOD-123).pdf, Packaging="Tape and Reel", Part Name=Diode-0002, Pricing 1="1=0.47000, 10=0.35200, 100=0.19930, 500=0.132", Radiation Hardening=No, RoHS=Yes, RoHS Compliant=Yes, Stock 1=237825, Supplier 1=Digi-Key, Viewing Angle=120°
D6: library part Diode-0008, "Rectifier Diode Schottky 40V 2A Automotive 2-Pin SMB T/R", Average Rectified Current=200mA, Capacitance=10pF, Case/Package=SMB, Forward Voltage=800mV, LCSC Part Number=C460673, Manufacturer=Diodes, Max Forward Surge Current (Ifsm)=600mA, Max Operating Temperature=150°C, Max Power Dissipation=200mW, Max Repetitive Reverse Voltage (Vrrm)=30V, Max Reverse Current=2uA, Min Operating Temperature=-65°C, Package Description="2-Pin Small Outline Diode, Body 2.7 x 1.6 mm, Height 1.35 mm", Package Quantity=3000, Package Reference=SOD123, Supplier Part Number 1=B240Q-13-FDICT-ND, Category="Rectifier Diodes", Component Type=Diodes, ComponentLink1Description=https://datasheet.ciiva.com/34302/1539235-343, ComponentLink1URL=https://datasheet.ciiva.com/34302/1539235-343, ComponentLink2Description=https://datasheet.ciiva.com/22695/1911820-226, ComponentLink2URL=https://datasheet.ciiva.com/22695/1911820-226, ComponentLink3Description=https://datasheet.ciiva.com/15144/getdatashee, ComponentLink3URL=https://datasheet.ciiva.com/15144/getdatashee, Contact Plating=Tin,Matte, Current Rating=200mA, Datasheet URL=http://www.mccsemi.com/up_pdf/B5817W-B5819W(SOD-123).pdf, Datasheet Version="Rev. B, 01/2013", Forward Current=200mA, Height=1mm, Lead Free="Lead Free", Length=2.9mm, Manufacturer Part Number=B240Q-13-F, Manufacturer URL=http://www.mccsemi.com/, Max Reverse Voltage (DC)=30V, Mount="Surface Mount", Mounting Technology=SM, Number of Pins=2, Package URL=http://www.mccsemi.com/up_pdf/1N4448W(SOD-123).pdf, Packaging="Tape and Reel", Part Name=Diode-0008, Peak Non-Repetitive Surge Current=600mA, Power Dissipation=200mW, Power Rating=200mW, Pricing 1="1=0.40000, 10=0.32600, 100=0.22180, 500=0.166", Radiation Hardening=No, REACH SVHC="No SVHC", Reverse Recovery Time=5ns, RoHS=Yes, RoHS Compliant=Yes, Series=-, Stock 1=9228, Supplier 1=Digi-Key, Termination=SMD/SMT, Voltage Rating (DC)=30V, Weight=0.000282oz, Width=1.3mm
D7: library part Diode-0010, "Diode Zener Single 4.025V 3% 200mW 2-Pin SOD-323 T/R", Case/Package=SOD-323-2, LCSC Part Number=C236204, Manufacturer="ON Semiconductor", Manufacturer Part Number=MM3Z3V9ST1G, Max Operating Temperature=150°C, Max Power Dissipation=200mW, Max Reverse Leakage Current=3uA, Min Operating Temperature=-65°C, Package Quantity=3000, Supplier Part Number 1=MM3Z3V9ST1GOSCT-ND, Test Current=5mA, Category="Zener Diodes", ComponentLink1Description=https://datasheet.ciiva.com/899/mm3z2v4st1-d-, ComponentLink1URL=https://datasheet.ciiva.com/899/mm3z2v4st1-d-, Contact Plating=Tin,Matte, Element Configuration=Single, Height=1mm, Lead Free="Lead Free", Length=1.8mm, Mount="Surface Mount", Number of Pins=2, Packaging="Tape and Reel", Part Name=Diode-0010, Power Dissipation=200mW, Power Rating=200mW, Pricing 1="1=0.17000, 10=0.15200, 100=0.08260, 500=0.050", Radiation Hardening=No, RoHS=Yes, RoHS Compliant=Yes, Series=-, Stock 1=1010, Supplier 1=Digi-Key, Voltage Rating (DC)=3.9V, Width=1.35mm
DS1 DS7 DS8 DS11: library part Diode-0004, "LED Orange CLEAR 0603 SMD", Case Code (Imperial)=0603, Case Code (Metric)=1608, Color=Orange, Forward (Drive) Current=20mA, Forward Current=5mA, Forward Voltage=2.0V, LCSC Part Number=C434425, Lens Color=Colorless, Manufacturer="Vishay Lite-On", Max Operating Temperature=85°C, Min Operating Temperature=-55°C, Package Description="2-Pin Surface Mount Device, Body 1.6 x 0.8 mm", Supplier Part Number 1=160-1829-1-ND, Case/Package=0603, Category=LEDs, Datasheet URL=https://datasheet.ciiva.com/11773/0900766b80df3ad8-11773825.pdf, Datasheet Version="Rev. 2.0, 03/2010", Dimension=1.6x0.8x0.36mm, Dominant Wavelength=605nm, Height=0.35mm, Illumination Color=Orange, Intensity=22mcd, Lead Free="Lead Free", Lens Style=Diffused,Colorless,Rectangular,Clear, Lens Transparency=Clear, Lens Type=Clear, Luminous Intensity=28.1mcd, Manufacturer Part Number=LTST-C193KFKT-5A, Manufacturer URL=http://www.rohm.com/web/global/, Mount="Surface Mount", Mounting Technology=SurfaceMount, Number of Elements=1, Number of Pins=2, Package Reference=1608, Packaging="Tape and Reel", Part Name=Diode-0004, Pricing 1="1=0.39000, 10=0.20900, 100=0.09720, 500=0.089", Radiation Hardening=No, RoHS=Yes, RoHS Compliant=Yes, Stock 1=55639, Supplier 1=Digi-Key, Viewing Angle=130°, Width=0.8mm
DS2 DS6: library part Diode-0006, "LED Yellow CLEAR 0603 SMD", Case Code (Imperial)=0603, Case Code (Metric)=1608, Color=Yellow, Forward Current=30mA, Forward Voltage=2.0V, LCSC Part Number=C72038, Lens Color=Colorless, Manufacturer="Vishay Lite-On", Max Operating Temperature=85°C, Min Operating Temperature=-55°C, Package Quantity=1, Power Dissipation=75mW, Resistance="390 Ohm", Reverse Voltage=5V, Supplier Part Number 1=160-1831-1-ND, Test Current=5mA, Voltage Rating="50 V", Case/Package=0603, Case\Package=0603, Category=LEDs, ComponentLink1Description=https://datasheet.ciiva.com/11775/0900766b80d, ComponentLink1URL=https://datasheet.ciiva.com/11775/0900766b80d, ComponentLink2Description=https://datasheet.ciiva.com/4688/lite-on-ltst, ComponentLink2URL=https://datasheet.ciiva.com/4688/lite-on-ltst, ComponentLink3Description=https://datasheet.ciiva.com/26890/getdatashee, ComponentLink3URL=https://datasheet.ciiva.com/26890/getdatashee, ComponentLink4Description=https://datasheet.ciiva.com/2110/s-110-ltst-c, ComponentLink4URL=https://datasheet.ciiva.com/2110/s-110-ltst-c, ComponentLink5Description=https://datasheet.ciiva.com/2110/s-110-ltst-c, ComponentLink5URL=https://datasheet.ciiva.com/2110/s-110-ltst-c, ComponentLink6Description=https://datasheet.ciiva.com/2110/s-110-ltst-c, ComponentLink6URL=https://datasheet.ciiva.com/2110/s-110-ltst-c, ComponentLink7Description=https://datasheet.ciiva.com/2110/ltst-c193kfk, ComponentLink7URL=https://datasheet.ciiva.com/2110/ltst-c193kfk, DatasheetVersion=Mar-12, Depth=0.8mm, Dominant Wavelength=594.5nm, Height=0.35mm, Illumination Color=Yellow, Lead Free="Lead Free", Length=1.6mm, Lens Style=Diffused,Colorless,Rectangular, Lens Transparency=Clear, Luminous Intensity=45mcd, Manufacturer Part Number=LTST-C193KSKT-5A, Mount="Surface Mount", Number of Elements=1, Number of LEDs=1, Number of Pins=2, PackageDescription="2-Pin Surface Mount Device, Body 1.6 x 0.8 mm, Height 0.9 mm", PackageReference=HSMX-C190, Packaging="Tape and Reel", Part Name=Diode-0006, Pins=2, Power Rating=75mW, Pricing 1="1=0.39000, 10=0.20900, 100=0.09720, 500=0.089", Radiation Hardening=No, RoHS=Yes, RoHS Compliant=Yes, RoHSCompliant=true, Stock 1=147319, Supplier 1=Digi-Key, Viewing Angle=130°, Width=0.8mm
DS3 DS5 DS9 DS12: library part Diode-0007, "LED Green CLEAR 0603 SMD", Average Rectified Current=2A, Case Code (Imperial)=0603, Case Code (Metric)=1608, Case\Package=SOIC, Clock Frequency="100 KHz", Color=Green, Forward Current=5mA, Forward Voltage=2.0V, Frequency="400 KHz", LCSC Part Number=C72043, Lens Color=Colorless, Manufacturer="Vishay Lite-On", Max Operating Temperature=80°C, Max Repetitive Reverse Voltage (Vrrm)=40V, Max Reverse Current=500uA, Max Supply Voltage="5.5 V", Min Operating Temperature=-20°C, Min Supply Voltage="1.7 V", Nominal Supply Current="2 mA", Package Quantity=3000, Peak Non-Repetitive Surge Current=50A, Power Dissipation=76mW, Reverse Voltage=5V, Supplier Part Number 1=160-1832-1-ND, Access Time="3500 ns", Case/Package=0603, Category=LEDs, ComponentLink1Description=https://datasheet.ciiva.com/2111/ltst-c193tgk, ComponentLink1URL=https://datasheet.ciiva.com/2111/ltst-c193tgk, ComponentLink2Description=https://datasheet.ciiva.com/11775/0900766b80d, ComponentLink2URL=https://datasheet.ciiva.com/11775/0900766b80d, ComponentLink3Description=https://datasheet.ciiva.com/4689/lite-on-ltst, ComponentLink3URL=https://datasheet.ciiva.com/4689/lite-on-ltst, ComponentLink4Description=https://datasheet.ciiva.com/2111/p-100-ltst-c, ComponentLink4URL=https://datasheet.ciiva.com/2111/p-100-ltst-c, ComponentLink5Description=https://datasheet.ciiva.com/2111/p-100-ltst-c, ComponentLink5URL=https://datasheet.ciiva.com/2111/p-100-ltst-c, ComponentLink6Description=http://www.mouser.com/ds/2/115/B220AQ_Q-B260A, ComponentLink6URL=http://www.mouser.com/ds/2/115/B220AQ_Q-B260A, ComponentLink7Description=https://www.diodes.com/assets/Datasheets/ds13, ComponentLink7URL=https://www.diodes.com/assets/Datasheets/ds13, ComponentLink8Description=http://www.diodes.com/datasheets/ds13004.pdf?, ComponentLink8URL=http://www.diodes.com/datasheets/ds13004.pdf?, Contact Plating=Tin,Matte, DatasheetVersion=Mar-12, Density="32 kb", Depth=0.8mm, Dominant Wavelength=535nm, Element Configuration=Single, Height=0.35mm, Illumination Color=Green, Lead Free="Lead Free", Length=1.6mm, Lens Style=Diffused,Colorless,Rectangular, Lens Transparency=Clear, Luminous Intensity=280mcd, Manufacturer Part Number=LTST-C193TGKT-5A, Max Clock Frequency="100 KHz", Max Reverse Voltage (DC)=40V, Mount="Surface Mount", Number of Elements=1, Number of LEDs=1, Number of Pins=2, PackageDescription="2-Pin Surface Mount Device, Body 1.6 x 0.8 mm, Height 0.9 mm", PackageReference=HSMX-C190, Packaging="Tape and Reel", Part Name=Diode-0007, Pins=8, Pricing 1="1=0.45000, 10=0.27400, 100=0.15780, 1000=0.12", Radiation Hardening=No, RoHS=Yes, RoHS Compliant=Yes, RoHSCompliant=true, Series=-, Stock 1=429188, Supplier 1=Digi-Key, Test Current=5mA, Viewing Angle=130°, Width=0.8mm
DS4 DS10: library part Diode-0005, "LED RED CLEAR 0603 SMD", Case Code (Imperial)=0603, Case Code (Metric)=1608, Color=Red, Forward Current=5mA, Forward Voltage=2.0V, LCSC Part Number=C2286, Lens Color=Colorless, Manufacturer="Vishay Lite-On", Max Operating Temperature=85°C, Min Operating Temperature=-55°C, Operating Temp Range=-40Cto85C, Operating Temperature Classification=Industrial, Package Description="2-Pin Surface Mount Device, Body 3.2 x 1.6 mm", Package Quantity=3000, Package Reference=HSMX-C150, Package Type=ChipLed, Power Dissipation=50mW, Reverse Voltage=5V, Supplier Part Number 1=160-1830-1-ND, Test Current (It)=20mA, Case/Package=0603, Category=LEDs, Chip Material=GaAlAs, ComponentLink1Description=https://datasheet.ciiva.com/11775/0900766b80d, ComponentLink1URL=https://datasheet.ciiva.com/11775/0900766b80d, ComponentLink2Description=https://datasheet.ciiva.com/4689/100-ltst-c19, ComponentLink2URL=https://datasheet.ciiva.com/4689/100-ltst-c19, ComponentLink3Description=https://datasheet.ciiva.com/16210/ltst-c193kr, ComponentLink3URL=https://datasheet.ciiva.com/16210/ltst-c193kr, ComponentLink4Description=https://datasheet.ciiva.com/2110/s-110-ltst-c, ComponentLink4URL=https://datasheet.ciiva.com/2110/s-110-ltst-c, Datasheet URL=http://media.digikey.com/pdf/Data%20Sheets/Avago%20PDFs/HSMz-Czzz.pdf, Datasheet Version=03/2012, DELETED=Compliant, Depth=0.8mm, Dominant Wave Length=639nm, Dominant Wavelength=631nm, Emitting Color=Red, Height=0.35mm, High Brightness=No, Illumination Color=Red, Lead Free="Lead Free", Length=1.6mm, Lens Dimensions=2x1.6x0.6mm, Lens Style=Diffused,Colorless,Clear,Rectangular, Lens Transparency=Clear, Lens Type=ColorlessDiffused, Lum Intensity=17mcd, Luminous Intensity=45mcd, Main Category=ChipLED, Manufacturer Part Number=LTST-C193KRKT-5A, Manufacturer URL=http://www.avagotech.com/, Mount="Surface Mount", Mounting=SurfaceMount, Mounting Technology=SurfaceMount, Number of  Elements=1, Number of Elements=1, Number of LEDs=1, Number of Pins=2, Packaging="Tape and Reel", Part Name=Diode-0005, Peak Wavelength=660nm, Pin Count=2, Pricing 1="1=0.39000, 10=0.20900, 100=0.09720, 500=0.089", Product Depth (mm)=1.6mm, Product Height (mm)=1.1mm, Product Length (mm)=3.2mm, Rad Hardened=No, Radiation Hardening=No, RoHS=Yes, RoHS Compliant=Yes, Series=-, Shape Type=Rectangular, Stock 1=476214, Supplier 1=Digi-Key, Test Current=5mA, Type=Uni-Color, Viewing Angle=130°, Width=0.8mm
F1 F2: "15VDC 500mA", Case Code (Imperial)=1812, Case Code (Metric)=4532, Current Rating=100A, Hold Current=500mA, LCSC Part Number=C17313, Manufacturer=Bourns, Max Operating Temperature=85°C, Min Operating Temperature=-40°C, Operating Supply Voltage=15V, Package Description="2-Pin Surface Mount Device, Body 4.55 x 3.24 mm", Package Quantity=2000, Power Dissipation=800mW, Resistance=150mR, Supplier Part Number 1=MF-MSMF050-2CT-ND, Trip Current=1A, Aging="1000 hr @ +85 °C (Passive)", Approvals=UL,CSA,TUV, Case/Package=1812, Category=Fuses, Component Type=Fuses, ComponentLink1Description=https://datasheet.ciiva.com/34302/1164200-343, ComponentLink1URL=https://datasheet.ciiva.com/34302/1164200-343, ComponentLink2Description=https://datasheet.ciiva.com/1228/1786007-1228, ComponentLink2URL=https://datasheet.ciiva.com/1228/1786007-1228, ComponentLink3Description=https://datasheet.ciiva.com/32426/mf-msmf-ser, ComponentLink3URL=https://datasheet.ciiva.com/32426/mf-msmf-ser, ComponentLink4Description=https://datasheet.ciiva.com/22749/1695373-227, ComponentLink4URL=https://datasheet.ciiva.com/22749/1695373-227, ComponentLink5Description=https://datasheet.ciiva.com/46395/1695373-463, ComponentLink5URL=https://datasheet.ciiva.com/46395/1695373-463, ComponentLink6Description=https://datasheet.ciiva.com/4501/mfmsmf-72300, ComponentLink6URL=https://datasheet.ciiva.com/4501/mfmsmf-72300, ComponentLink7Description=https://datasheet.ciiva.com/14537/70153434-14, ComponentLink7URL=https://datasheet.ciiva.com/14537/70153434-14, ComponentLink8Description=https://datasheet.ciiva.com/1274/1786007-1274, ComponentLink8URL=https://datasheet.ciiva.com/1274/1786007-1274, ComponentLink9Description=https://datasheet.ciiva.com/1274/1786007-1274, ComponentLink9URL=https://datasheet.ciiva.com/1274/1786007-1274, ComponentLink10Description=https://datasheet.ciiva.com/3019/mfmsmf-30196, ComponentLink10URL=https://datasheet.ciiva.com/3019/mfmsmf-30196, ComponentLink11Description=https://datasheet.ciiva.com/16205/mfmsmf-1620, ComponentLink11URL=https://datasheet.ciiva.com/16205/mfmsmf-1620, ComponentLink12Description=https://datasheet.ciiva.com/15226/getdatashee, ComponentLink12URL=https://datasheet.ciiva.com/15226/getdatashee, ComponentLink13Description=https://datasheet.ciiva.com/3019/mfmsmf-30196, ComponentLink13URL=https://datasheet.ciiva.com/3019/mfmsmf-30196, ComponentLink14Description=https://datasheet.ciiva.com/326/mfmsmf-326355, ComponentLink14URL=https://datasheet.ciiva.com/326/mfmsmf-326355, ComponentLink15Description=https://datasheet.ciiva.com/326/mfmsmf-326356, ComponentLink15URL=https://datasheet.ciiva.com/326/mfmsmf-326356, ComponentLink16Description=https://datasheet.ciiva.com/326/mfmsmf-326354, ComponentLink16URL=https://datasheet.ciiva.com/326/mfmsmf-326354, Contact Plating=Gold, Datasheet URL=http://www.bourns.com/data/global/pdfs/mfmsmf.pdf, Datasheet Version="Rev. AG, 08/2016", Height=0.85mm, Lead Free="Lead Free", Length=4.73mm, Manufacturer Part Number=MF-MSMF050-2, Max Current Rating=100A, Mount="Surface Mount,PCB", Mounting Technology=SM, Number of Pins=2, Number of Terminals/Pins=2, Package Reference=MF-MSMF050-2, Packaging="Tape and Reel", Part Name=MF-MSMF050-2, Pricing 1="1=0.32000, 5=0.31000, 10=0.29500, 50=0.26360,", Radiation Hardening=No, REACH SVHC="No SVHC", RoHS=Yes, RoHS Compliant=Yes, Series=MF-MSMF, Stock 1=59686, Supplier 1=Digi-Key, Terminal Material=Gold, Termination=SMD/SMT, Time to Trip=0.15s, Voltage Rating=15V, Voltage Rating (DC)=15V, Width=3.41mm
J: library part CON-0009, "Male Box Header WR-BHD, THT, Vertical, pitch", Color=Black, Manufacturer="Wurth Electronics", Supplier Part Number 1=732-5401-ND, Category="Headers and Wire Housings", Connector Type="Male Pin", Contact Material=Copper, Contact Plating=Gold, Gender=Male, Manufacturer Part Number=61204021621, Mount="Through Hole", Number of Contacts=40, Number of Positions=40, Number of Rows=2, Packaging=Tray, Part Name=CON-0009, Pitch=0.1inch, Pricing 1="1=1.21000, 10=1.16000, 80=1.02000, 160=0.8800", RoHS=Yes, Stock 1=3521, Supplier 1=Digi-Key, Termination=Solder
J1: library part CON-0007, "Phoenix Contact 1751251, MKDS 1/ 33, 5, PCB t", Color=Green, LCSC Part Number=C91152, Manufacturer="Phoenix Contact", Manufacturer Part Number=1751251, Package=None, Supplier Part Number 1=277-5749-ND, Availability=Unavailable, Category="Terminal Blocks", Housing Material=Nylon, MF="Phoenix Contact", Mount="Through Hole", MP=1751251, Number of Pins=3, Part Name=CON-0007, Price=None, Pricing 1="1=2.16000, 10=2.07000, 50=1.98000, 100=1.9260", RoHS=Yes, SnapEDA_Link=https://www.snapeda.com/parts/1751251/Phoenix%20Contact/view-part/553210/?ref=snap, Stock 1=9572, Supplier 1=Digi-Key
J2 J7 J14 J15: library part CON-0001, "Conn Header Right angle 3.5 pitch 2P", Color=Black, LCSC Part Number=C409115, Manufacturer="Adam Equipment", Package Quantity=1, Supplier Part Number 1=2057-EBSA-02-A-ND, Category=Connectors, ComponentLink1Description=https://datasheet.ciiva.com/741/xrxczzzsxxn-r, ComponentLink1URL=https://datasheet.ciiva.com/741/xrxczzzsxxn-r, Connector Type="Male Pin", Contact Mating Length=0.318inch, Contact Plating=Gold, Contact Type="Male Pin", Manufacturer Part Number=EBSA-02-A, Mount="Through Hole", Number of Positions=6, Number of Rows=1, Packaging=Bulk, Part Name=CON-0001, Pitch=0.1inch, Pricing 1="1=0.58000, 10=0.31600, 25=0.23600, 50=0.21040", Pricing 2="1=0.21000, 10=0.19800, 25=0.16920, 50=0.14820", RoHS=Yes, RoHS Compliant=Yes, Series=-, Stock 1=2090, Stock 2=1241, Supplier 1=Digi-Key, Supplier 2=Digi-Key, Supplier Part Number 2=S1211EC-06-ND, Termination=Solder
J5: library part CON-0006, "Pluggable Term Blocks BCH-508HS- 2 GN 5.08", Current=13.5A, Flammability Rating="UL94 V-0", Housing Color=Green, LCSC Part Number=N/A, Manufacturer="Phoenix Contact", Manufacturer Part Number=5442002, Package Quantity=50, Supplier Part Number 1=277-11311-ND, Voltage=300V, Voltage Rating=200V, Approvals=UL,CSA,cULus,CB,EAC, ATTR="HEADER TERM BLK 5.08MM 2POS RTA GRAY", Category="Terminal Blocks", ComponentLink1Description=https://datasheet.ciiva.com/16046/1751251-160, ComponentLink1URL=https://datasheet.ciiva.com/16046/1751251-160, ComponentLink2Description=https://datasheet.ciiva.com/6745/1751251-6745, ComponentLink2URL=https://datasheet.ciiva.com/6745/1751251-6745, ComponentLink3Description=https://datasheet.ciiva.com/29226/774163-da-0, ComponentLink3URL=https://datasheet.ciiva.com/29226/774163-da-0, Connector Type=Screw, Contact Material=Tin, Current Rating=13.5A, Gender=Male, Height=11mm, Insulation Material=Nylon, Lead Free="Lead Free", Length=7.3mm, Material=Polyamide, Max Current Rating=13.5A, Mount="Through Hole", Number of Circuits=3, Number of Contacts=3, Number of Levels=1, Number of Poles=3, Number of Positions=3, Number of Positions Per Level=3, Number of Rows=1, Orientation=Straight, Packaging=Bulk, Part Name=CON-0006, Pitch=3.5mm, PKG=TB508HDR02_RTA, Pricing 1="1=0.68000, 10=0.64900, 50=0.63140, 100=0.5900", REACH SVHC=Unknown, RoHS=Yes, RoHS Compliant=Yes, Series="COMBICON MKDS", Stock 1=219, Stripping Length=5mm, Supplier 1=Digi-Key, Termination=Screw, Weight=0.056791oz, Width=12mm, Wire Gauge (Max)=30AWG, Wire Gauge (Min)=16AWG, Wire/Cable Gauge=30AWG
J6: library part CON-0005, "Pluggable Term Blocks BCH-508HS- 2 GR 5.08", Color=Grey, Current Rating=12A, LCSC Part Number=N/A, Manufacturer="Phoenix Contact", Manufacturer Part Number=5433668, Package Quantity=100, Supplier Part Number 1=277-11218-ND, Voltage Rating=320V, ATTR="HEADER TERM BLK 5.08MM 2POS RTA GREEN", Category="Terminal Blocks", Contact Plating=Tin, Mount="Through Hole", Number of Levels=1, Number of Positions Per Level=2, Packaging=Bulk, Part Name=CON-0005, PKG=TB508HDR02_RTA, Pricing 1="1=0.69000, 10=0.66000, 50=0.64200, 100=0.6000", RoHS=Yes, Stock 1=100, Supplier 1=Digi-Key, Termination=Solder